# Altium PCB flbnew.PcbDoc
Units mm, origin at the board's own origin, x right, y up, seen from the top; angles counter-clockwise.
Board outline 63.5 x 40.89 mm, 2 copper layers (Top Layer, Bottom Layer); 78 components, 52 nets, 285 pads, 14 vias.
Unrouted connection lines stored in the file: 107.
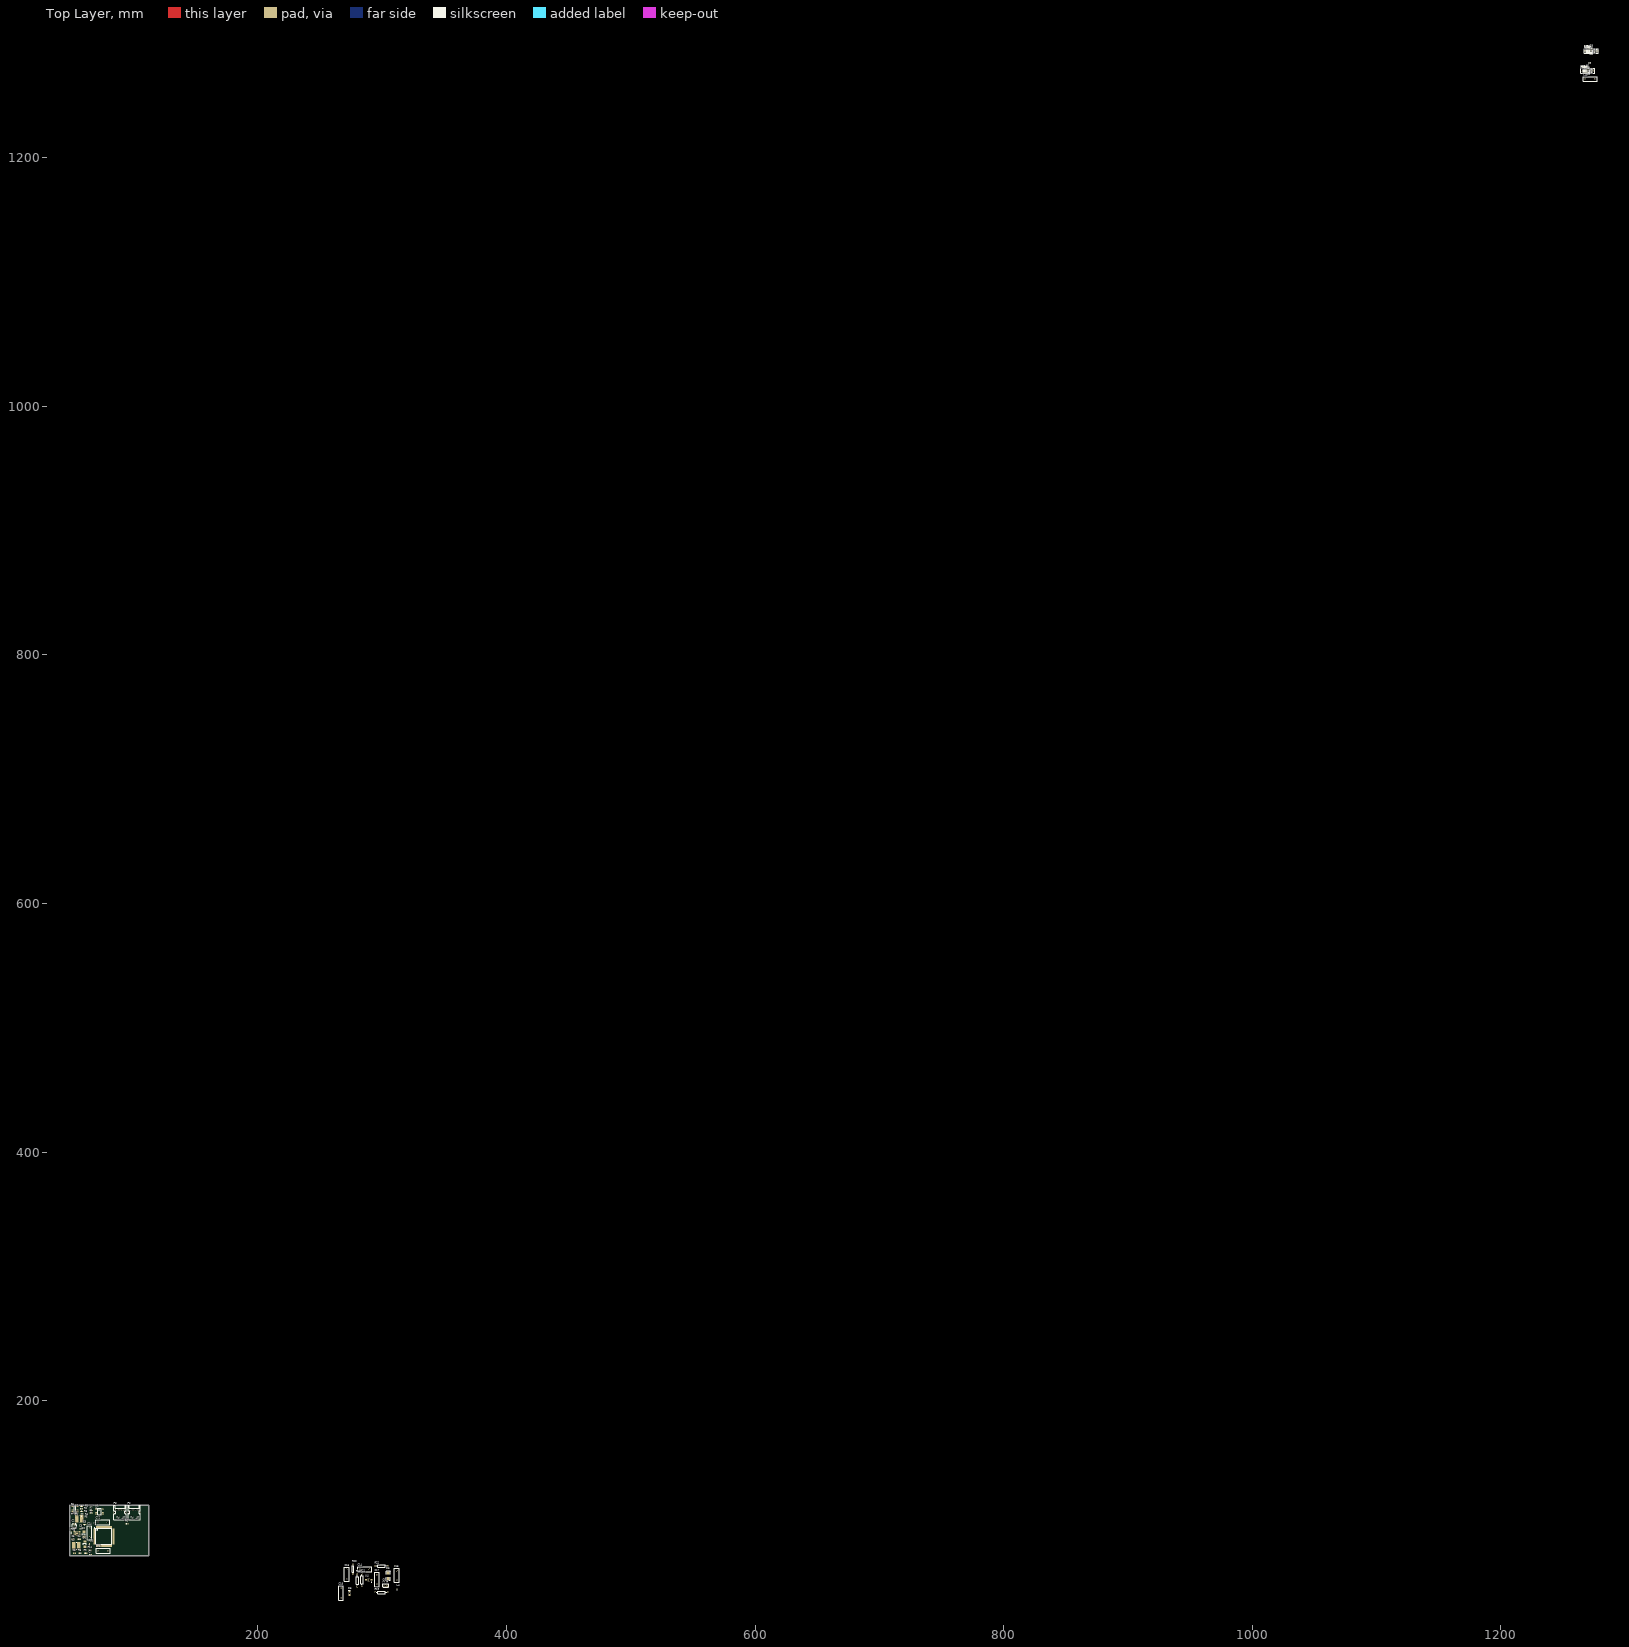
[diagram p0: Top Layer view]
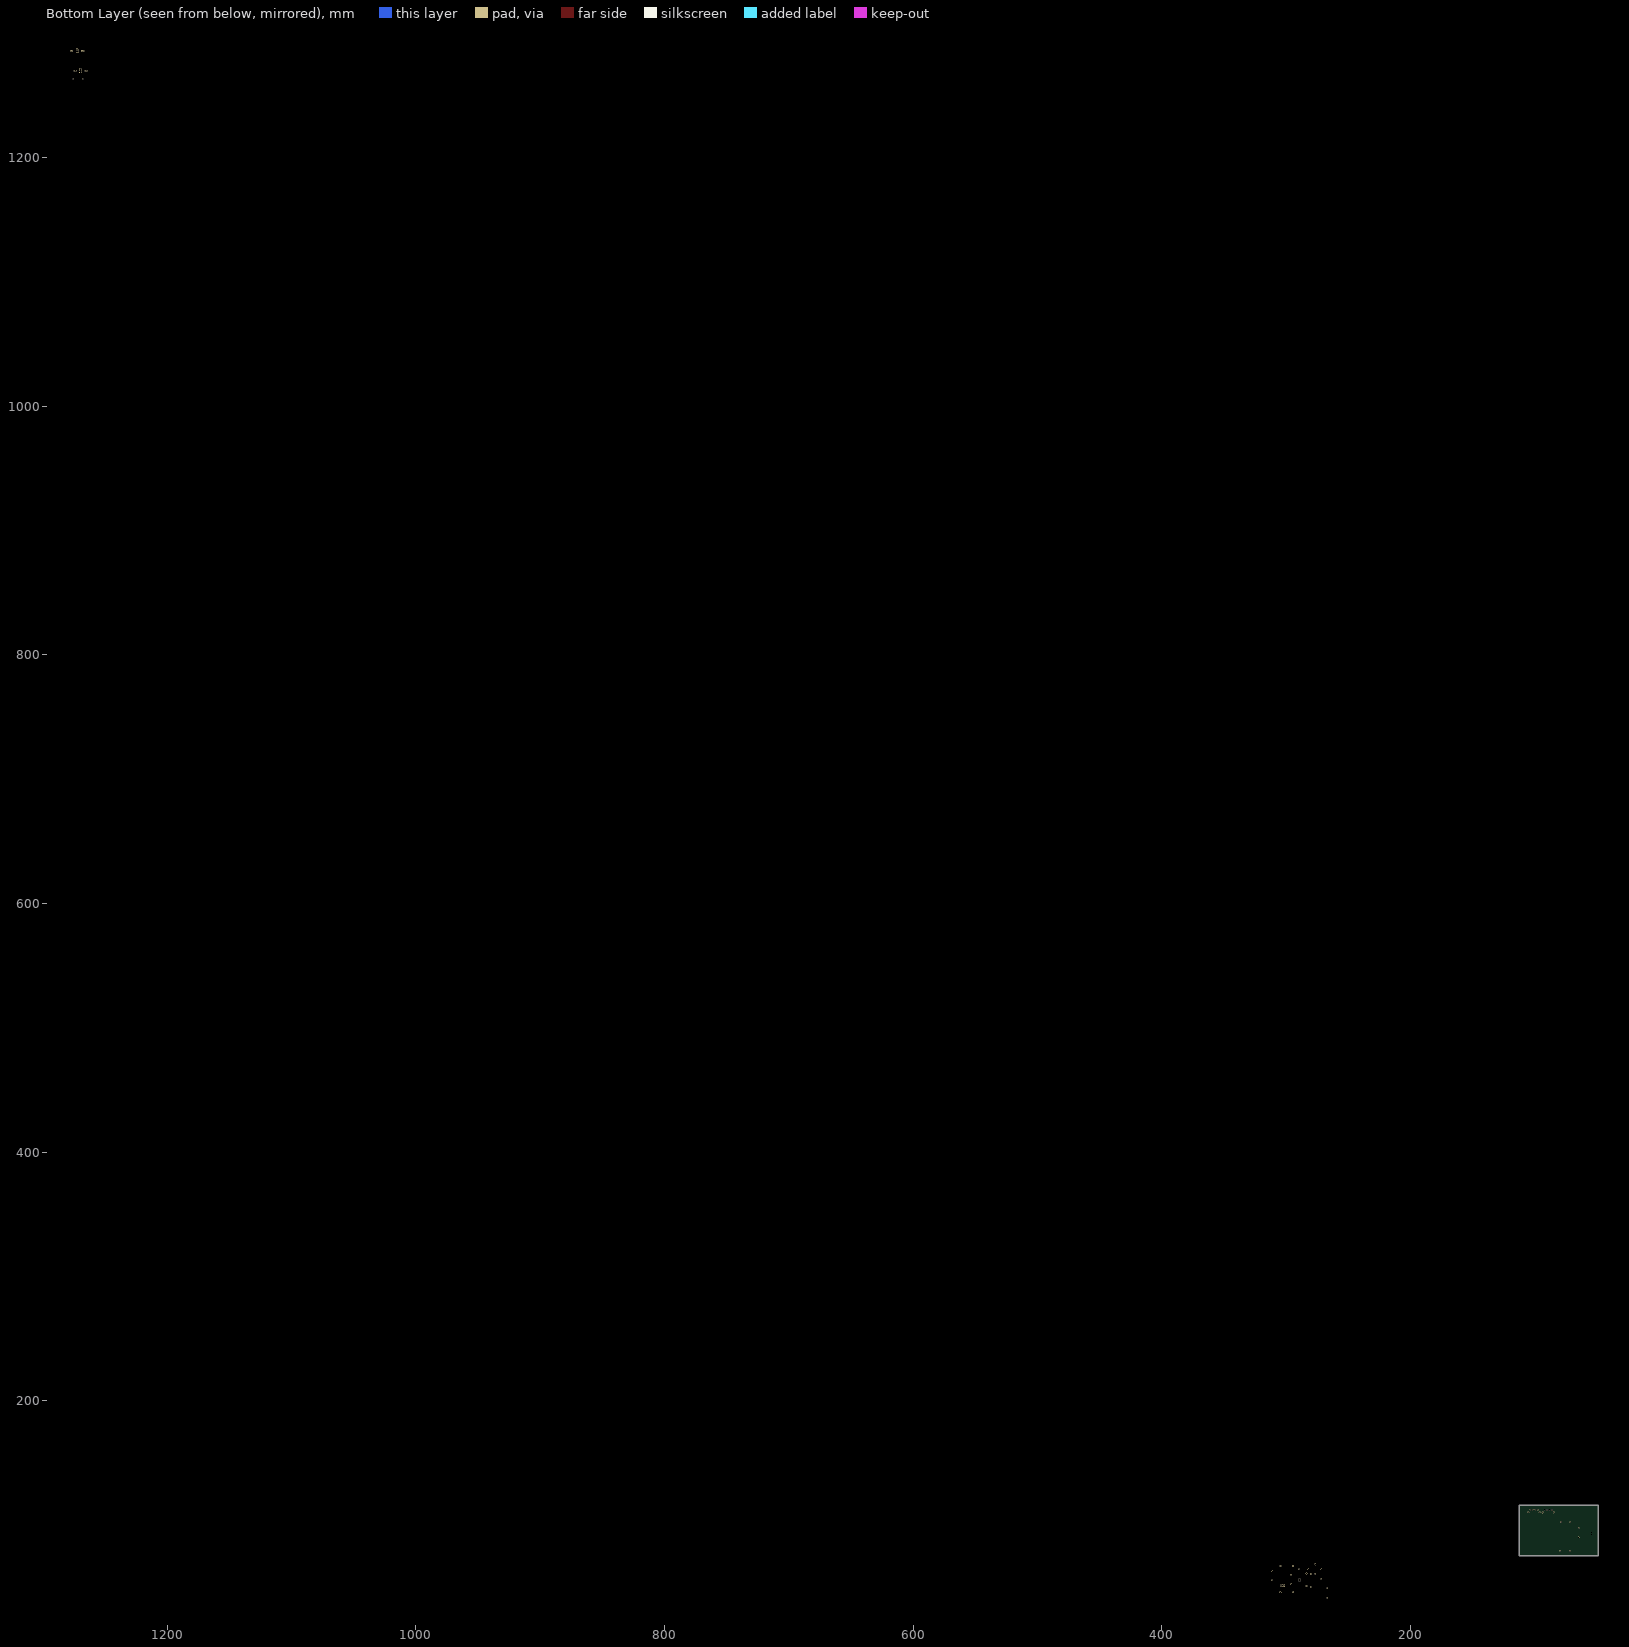
[diagram p1: Bottom Layer view, seen from below]

## Layer stack, top to bottom
Top Layer: signal copper 0.0356
Dielectric: dielectric 0.32, FR-4, Dk 4.8
Bottom Layer: signal copper 0.0356

## Board outline
48.768,75.184 112.268,75.184 112.268,115.951 48.768,116.078

## Design rules (kind name [scope] priority, off if disabled: settings)
Clearance [All] p1: gap=0.254
PolygonConnect [All] p1: connectstyle=Relief reliefconductorwidth=0.254 reliefentries=4 polygonreliefangle="90 Angle" airgapwidth=0.254
RoomDefinition U_ledcurrentdriver3 [InComponentClass('U_ledcurrentdriver3')] p1: confinementstyle=ConfineIn formatcopy=TRUE lockcomponents=FALSE outline 1266.571,1283.335 1305.56,1283.335 1305.56,1293.368 1266.571,1293.368
RoomDefinition U_ledcurrentdriver2 [InComponentClass('U_ledcurrentdriver2')] p2: confinementstyle=ConfineIn formatcopy=TRUE lockcomponents=FALSE outline 264.414,37.719 314.706,37.719 314.706,71.247 264.414,71.247
RoomDefinition U_ledcurrentdriver1 [InComponentClass('U_ledcurrentdriver1')] p3: confinementstyle=ConfineIn formatcopy=TRUE lockcomponents=FALSE outline 1263.904,1267.333 1302.385,1267.333 1302.385,1277.366 1263.904,1277.366
RoomDefinition "U_Dual 5V+3" [InComponentClass('U_Dual 5V+3')] p4: confinementstyle=ConfineIn formatcopy=TRUE lockcomponents=FALSE outline 49.911,75.311 59.563,75.311 59.563,102.616 49.911,102.616
RoomDefinition "U_CAN Transciever" [InComponentClass('U_CAN Transciever')] p5: confinementstyle=ConfineIn formatcopy=TRUE lockcomponents=FALSE outline 63.699,106.807 77.47,106.807 77.47,115.57 63.699,115.57
RoomDefinition "U_CAN Termination Connector (JST)" [InComponentClass('U_CAN Termination Connector (JST)')] p6: confinementstyle=ConfineIn formatcopy=TRUE lockcomponents=FALSE outline 83.947,99.187 111.252,99.187 111.252,116.205 83.947,116.205
RoomDefinition "U_ARM JTAG Header (vertical)" [InComponentClass('U_ARM JTAG Header (vertical)')] p7: confinementstyle=ConfineIn formatcopy=TRUE lockcomponents=FALSE outline 49.011,103.617 62.562,103.617 62.562,115.682 49.011,115.682
RoomDefinition flbmain [InComponentClass('flbmain')] p8: confinementstyle=ConfineIn formatcopy=TRUE lockcomponents=FALSE outline 62.073,76.447 88.699,76.447 88.699,105.403 62.073,105.403
RoutingVias [All] p1: holewidth=0.711 width=1.27 viastyle="Through Hole" minholewidth=0.711 minwidth=1.27 maxholewidth=0.711 maxwidth=1.27
SilkscreenOverComponentPads [All] p1: minsilkscreentomaskgap=0.254
SolderMaskExpansion [All] p1: expansion=0.102
Width [All] p1: maxlimit=0.254 minlimit=0.254 preferedwidth=0.254
27 further rules are at their usual default settings.

## Classes and differential pairs
channel class ledcurrentdriver: U_ledcurrentdriver1 U_ledcurrentdriver2 U_ledcurrentdriver3
net class Power: +3.3 +5 GND NetC2_1
component class U_ledcurrentdriver3: C19 C20 C21 C22 C23 D7 D8 L5 Q3 R23 R24 R25 R26 R27 U5
component class U_ledcurrentdriver2: C14 C15 C16 C17 C18 D5 D6 L4 Q2 R18 R19 R20 R21 R22 U4
component class U_ledcurrentdriver1: C9 C10 C11 C12 C13 D3 D4 L3 Q1 R13 R14 R15 R16 R17 U3
component class "U_Dual 5V+3": C2 C3 C4 C5 C6 C7 C8 D1 D2 L1 L2 R8 R9 R10 R11 R12 U2
component class "U_CAN Transciever": C1 R7 U1
component class "U_CAN Termination Connector (JST)": P2 P3 R6
component class "U_ARM JTAG Header (vertical)": P1 R1 R2 R3 R4 R5
component class flbmain: *1 C24 C?1 C?2

## Components (designator, comment, footprint, x,y, rotation, side; value= is the part's Value field where it differs from the comment)
*1 "AT90CAN128" TQFP80P1600X1600X120-64N 76.17,90.798 r0 top
C1 "Cap" C0603 65.913,109.728 r0 top
C2 "Cap Pol1" EEEHC1H2R2R 52.197,97.917 r0 top (schematic designator C1)
C3 "Cap" C0603 57.785,97.028 r0 top (schematic designator C2)
C4 "Cap" C0603 56.261,88.519 r0 top (schematic designator C3)
C5 "Cap" C0805 51.308,88.646 r0 top (schematic designator C4)
C6 "Cap" C0805 52.413,77.216 r0 top (schematic designator C5)
C7 "Cap" C0603 65.278,76.2 r0 top (schematic designator C6)
C8 "Cap" C0603 60.706,100.33 r0 top (schematic designator C7)
C9 "Cap" RAD-0.3 1269.987,1269.987 r0 top (schematic designator C2)
C10 "Cap" RAD-0.3 1269.987,1269.987 r0 top (schematic designator C3)
C11 "Cap" RAD-0.3 1269.987,1269.987 r0 top (schematic designator C4)
C12 "Cap" RAD-0.3 1269.987,1269.987 r0 top (schematic designator C1)
C13 "Cap" RAD-0.3 1271.905,1263.396 r0 top (schematic designator C5)
C14 "Cap" RAD-0.3 285.877,64.389 r180 top (schematic designator C2)
C15 "Cap" RAD-0.3 311.658,59.563 r90 top (schematic designator C3)
C16 "Cap" RAD-0.3 271.526,60.452 r90 top (schematic designator C4)
C17 "Cap" RAD-0.3 295.783,56.134 r90 top (schematic designator C1)
C18 "Cap" RAD-0.3 266.954,45.339 r90 top (schematic designator C5)
C19 "Cap" RAD-0.3 1272.654,1285.989 r0 top (schematic designator C2)
C20 "Cap" RAD-0.3 1272.654,1285.989 r0 top (schematic designator C3)
C21 "Cap" RAD-0.3 1272.654,1285.989 r0 top (schematic designator C4)
C22 "Cap" RAD-0.3 1272.654,1285.989 r0 top (schematic designator C1)
C23 "Cap" RAD-0.3 1272.654,1285.989 r0 top (schematic designator C5)
C24 "Cap" RAD-0.3 64.613,93.846 r90 top (schematic designator C8)
C?1 "Cap" RAD-0.3 75.535,79.241 r180 top (schematic designator C6)
C?2 "Cap" RAD-0.3 75.154,102.228 r180 top (schematic designator C7)
D1 "D Schottky" VS-10BQ030TRPBF 60.833,84.709 r90 top
D2 "D Schottky" VS-10BQ030TRPBF 60.071,92.583 r90 top
D3 "LED0" "SML-01 (ROHM LED SERIES)" 1269.987,1269.987 r0 top (schematic designator D1)
D4 "D Schottky" SMB 1269.987,1269.987 r0 top (schematic designator D2)
D5 "LED0" "SML-01 (ROHM LED SERIES)" 273.685,45.085 r90 top (schematic designator D1)
D6 "D Schottky" SMB 304.8,59.309 r90 top (schematic designator D2)
D7 "LED0" "SML-01 (ROHM LED SERIES)" 1272.654,1285.989 r0 top (schematic designator D1)
D8 "D Schottky" SMB 1272.654,1285.989 r0 top (schematic designator D2)
L1 "Inductor" SDR0604-150YL 56.261,105.156 r0 top
L2 "Inductor" SDR0604-150YL 53.975,83.312 r0 top
L3 "Inductor" 0402-A 1269.987,1269.987 r0 top (schematic designator L1)
L4 "Inductor" 0402-A 311.912,49.022 r90 top (schematic designator L1)
L5 "Inductor" 0402-A 1272.654,1285.989 r0 top (schematic designator L1)
P1 "Header 5X2" FTSH-105-01-L-DV 49.9,109.078 r0 top
P2 "Header 4" S04B-PASK-2 103.529,112.336 r180 top (schematic designator P1)
P3 "Header 4" S04B-PASK-2 92.106,112.268 r180 top (schematic designator P2)
Q1 "MOSFET-P FDC658AP" E3 1269.987,1269.987 r0 top
Q2 "MOSFET-P FDC658AP" E3 302.768,51.181 r90 top (schematic designator Q1)
Q3 "MOSFET-P FDC658AP" E3 1272.654,1285.989 r0 top (schematic designator Q1)
R1 "Res" R0603 58.155,115.174 r0 top
R2 "Res" R0603 58.028,113.142 r0 top
R3 "Res" R0603 58.282,110.983 r0 top
R4 "Res" R0603 58.536,108.951 r0 top
R5 "Res" R0603 58.409,107.046 r0 top
R6 "Res2" R0603 94.639,101.033 r0 top (schematic designator R1)
R7 "Res" R0603 65.985,111.633 r180 top (schematic designator R1)
R8 "Res" R0603 56.985,77.216 r0 top (schematic designator R1)
R9 "Res" R0603 61.43,77.216 r0 top (schematic designator R2)
R10 "Res" R0603 64.516,84.201 r90 top (schematic designator R3)
R11 "Res" R0603 64.643,79.883 r0 top (schematic designator R4)
R12 "Res" R0603 49.911,93.599 r90 top (schematic designator R5)
R13 "Res2" AXIAL-0.4 1269.987,1269.987 r0 top (schematic designator R1)
R14 "Res2" AXIAL-0.4 1269.987,1269.987 r0 top (schematic designator R2)
R15 "Res1" AXIAL-0.3 1269.987,1269.987 r0 top (schematic designator R3)
R16 "Res2" AXIAL-0.4 1269.987,1269.987 r0 top (schematic designator R4)
R17 "Res2" AXIAL-0.4 1269.987,1269.987 r0 top (schematic designator R5)
R18 "Res2" AXIAL-0.4 280.035,55.499 r90 top (schematic designator R1)
R19 "Res2" AXIAL-0.4 299.466,45.847 r180 top (schematic designator R2)
R20 "Res1" AXIAL-0.3 276.479,64.516 r90 top (schematic designator R3)
R21 "Res2" AXIAL-0.4 283.591,55.958 r90 top (schematic designator R4)
R22 "Res2" AXIAL-0.4 299.466,67.056 r180 top (schematic designator R5)
R23 "Res2" AXIAL-0.4 1272.654,1285.989 r0 top (schematic designator R1)
R24 "Res2" AXIAL-0.4 1272.654,1285.989 r0 top (schematic designator R2)
R25 "Res1" AXIAL-0.3 1272.654,1285.989 r0 top (schematic designator R3)
R26 "Res2" AXIAL-0.4 1272.654,1285.989 r0 top (schematic designator R4)
R27 "Res2" AXIAL-0.4 1272.654,1285.989 r0 top (schematic designator R5)
U1 "MCP2551" MCP2551 72.534,110.871 r0 top
U2 "LT3509" LT3509 54.356,93.091 r0 top (schematic designator U1)
U3 "LM3409 LED Driver" "10eMSOP + thermal pad - LM3409" 1269.987,1269.987 r0 top (schematic designator U1)
U4 "LM3409 LED Driver" "10eMSOP + thermal pad - LM3409" 289.179,55.753 r180 top (schematic designator U1)
U5 "LM3409 LED Driver" "10eMSOP + thermal pad - LM3409" 1272.654,1285.989 r0 top (schematic designator U1)

## Footprints (in the part's own frame and the unit in brackets; to place one, negate y for a bottom-side part, rotate by r counter-clockwise, add the part's x,y. Pads: shape width x height; smd on the part's side, far side on the other; paste and mask are expansions set on the pad)
"10eMSOP + thermal pad - LM3409" [mm] "TSSOP, 10-Leads, Body 3.1x3.1mm (max), Pitch 0.50mm, IPC Medium Density"
  rect 1.4x0.32 smd: 1(-2.2,1) 2(-2.2,0.5) 3(-2.2,0) 4(-2.2,-0.5) 5(-2.2,-1) 6(2.2,-1) 7(2.2,-0.5) 8(2.2,0) 9(2.2,0.5) 10(2.2,1)
  rect 2x2.4 smd: 11(0,0)
  silkscreen extent -2.32,1.59 -2.07,1.83, body extent -1.55,-1.55 1.55,1.55, height 1.09
0402-A [mm] "Chip Inductor, Body 1.0x0.5mm, IPC High Density"
  rect 0.6x0.5 smd: 1(-0.5,0) 2(0.5,0)
  silkscreen extent -1.1,-0.15 -1.1,0.15, body extent -0.55,-0.3 0.55,0.3, height 0.55
AXIAL-0.3 [mm] "Axial Device, Thru-Hole; 2 Leads; 0.3 in Pin Spacing"
  round 1.4 hole 0.85: 1(-3.81,0) 2(3.81,0)
  silkscreen extent -2.77,-0.76 2.77,0.76
AXIAL-0.4 [mm] "Axial Device, Thru-Hole; 2 Leads; 0.4 in Pin Spacing"
  round 1.4 hole 0.85: 1(-5.08,0) 2(5.08,0)
  silkscreen extent -4.06,-1.02 4.06,1.02
C0603 [mm] "Chip Capacitor, 2-Leads, Body 1.6x0.8mm, IPC Medium Density"
  rect 1x0.95 smd: 1(-0.8,0) 2(0.8,0)
  silkscreen extent 0,-0.38 0,0.38, body extent -0.88,-0.48 0.87,0.48, height 0.8
C0805 [mm] "Chip Capacitor, Body 2.0x1.3mm, IPC High Density"
  rect 1.1x1.4 smd: 1(-0.75,0) 2(0.75,0)
  body extent -1.1,-0.72 1.1,0.72, height 1.4
E3 [mm] "TO, Flat Index; 3 In-Line, Axial Leads; Body Dia. 4.6mm; Lead Dia. 0.5 mm (max)"
  oval 2x1 hole 0.8: 1(0,1.27) 2(0,0) 3(0,-1.27)
  silkscreen extent -1.41,-2.41 1.41,2.41
EEEHC1H2R2R [mm] "PANASONIC - EEEHC1H2R2R - CAPACITOR, ELECTROLYTIC, 50V, 2.2UF"
  rect 0.8x2 smd: 1(0,2.8) 2(0,0)
  silkscreen extent -2,-0.48 2,3.28, body extent -2.15,-0.9 2.15,3.7, height 5.9
FTSH-105-01-L-DV [mm] "HEADER, 1.27MM, SMD, 10WAY"
  rect 1.9x0.7 smd: 1(0.9,5.725) 2(4.95,5.725) 3(0.9,4.456) 4(4.95,4.456) 5(0.9,3.187) 6(4.95,3.187) 7(0.9,1.919) 8(4.95,1.919) 9(0.9,0.65) 10(4.95,0.65)
  silkscreen extent 2.2,-0.1 3.7,6.4, body extent 0,0 5.84,6.35, height 5.97
LT3509 [mm] "LT3509"
  oval 1.6x0.3 smd: 1(-2.05,1.75) 2(-2.05,1.25) 3(-2.05,0.75) 4(-2.05,0.25) 5(-2.05,-0.25) 6(-2.05,-0.75) 7(-2.05,-1.25) 8(-2.05,-1.75) 9(2.05,-1.75) 10(2.05,-1.25) 11(2.05,-0.75) 12(2.05,-0.25) 13(2.05,0.25) 14(2.05,0.75) 15(2.05,1.25) 16(2.05,1.75)
  rect 1.9x3.3 smd: 17(0,0)
  silkscreen extent -2.17,2.33 -1.92,2.57, body extent -1.55,-2.07 1.55,2.07, height 1.1
MCP2551 [mm]
  oval 1.7x0.6 smd: 1(-2.65,1.905) 2(-2.65,0.635) 3(-2.65,-0.635) 4(-2.65,-1.905) 5(2.65,-1.905) 6(2.65,-0.635) 7(2.65,0.635) 8(2.65,1.905)
  silkscreen extent -2.77,-2.5 1.4,2.88, body extent -1.99,-2.5 1.99,2.5, height 1.75
R0603 [mm]
  rect 1x1 smd: 1(-0.8,0) 2(0.8,0)
  silkscreen extent 0,-0.4 0,0.4, body extent -0.85,-0.48 0.85,0.47, height 0.45
RAD-0.3 [mm] "Radial Cap, Thru-Hole; 2 Leads; 0.3 in Pin Spacing"
  round 1.2 hole 0.7: 1(-3.81,0) 2(3.81,0)
  silkscreen extent -5.71,-1.91 5.71,1.91
S04B-PASK-2 [mm] "JST (JAPAN SOLDERLESS TERMINALS) - S04B-PASK-2 - HEADER, PA, 4WAY, SIDE, 2MM"
  rect 1x1 hole 0.7: 1(6,0)
  round 1 hole 0.7: 2(4,0) 3(2,0) 4(0,0)
  round 1.4 hole 1.1: ""(-1.5,2.1) ""(7.5,2.1)
  silkscreen extent -2,-3.5 8,8.2, body extent -2,-3.5 8,8.2, height 6.5
SDR0604-150YL [mm] "BOURNS - SDR0604-150YL - INDUCTOR, SMD, 15UH, 1.6A"
  rect 2.95x5.9 smd: 1(-2.025,0) 2(2.025,0)
  silkscreen extent -0.15,-2.9 0.15,2.9, body extent -2.9,-2.88 2.9,2.92, height 4.8
SMB [mm] "DO-214-AA/SMB; 2 C-Bend Leads; Body 5.3 x 3.6 mm, inc. leads (LxW)"
  rect 2.3x2.3 smd: 1(-2.25,0) 2(2.25,0)
  silkscreen extent -3.8,-1.55 4.1,1.55
"SML-01 (ROHM LED SERIES)" [mm] "ROHM Chip LEDs with Reflector,1208<3.0x2.0 t=1.3mm>, Medium / High Brightness Type"
  rect 1.55x1.8 smd: 1(-1.475,0) 2(1.475,0)
  silkscreen extent -0.15,-0.95 2.55,0.95, body extent -1.6,-0.95 1.6,0.95, height 1.5
TQFP80P1600X1600X120-64N [mm] "TQFP, 64-Leads, Body 16.0x16.0mm (max), Pitch 0.80mm, IPC Medium Density"
  rect 1.6x0.55 smd: 1(-7.65,6) 2(-7.65,5.2) 3(-7.65,4.4) 4(-7.65,3.6) 5(-7.65,2.8) 6(-7.65,2) 7(-7.65,1.2) 8(-7.65,0.4) 9(-7.65,-0.4) 10(-7.65,-1.2) 11(-7.65,-2) 12(-7.65,-2.8) 13(-7.65,-3.6) 14(-7.65,-4.4) 15(-7.65,-5.2) 16(-7.65,-6) 33(7.65,-6) 34(7.65,-5.2) 35(7.65,-4.4) 36(7.65,-3.6) 37(7.65,-2.8) 38(7.65,-2) 39(7.65,-1.2) 40(7.65,-0.4) 41(7.65,0.4) 42(7.65,1.2) 43(7.65,2) 44(7.65,2.8) 45(7.65,3.6) 46(7.65,4.4) 47(7.65,5.2) 48(7.65,6)
  rect 0.55x1.6 smd: 17(-6,-7.65) 18(-5.2,-7.65) 19(-4.4,-7.65) 20(-3.6,-7.65) 21(-2.8,-7.65) 22(-2,-7.65) 23(-1.2,-7.65) 24(-0.4,-7.65) 25(0.4,-7.65) 26(1.2,-7.65) 27(2,-7.65) 28(2.8,-7.65) 29(3.6,-7.65) 30(4.4,-7.65) 31(5.2,-7.65) 32(6,-7.65) 49(6,7.65) 50(5.2,7.65) 51(4.4,7.65) 52(3.6,7.65) 53(2.8,7.65) 54(2,7.65) 55(1.2,7.65) 56(0.4,7.65) 57(-0.4,7.65) 58(-1.2,7.65) 59(-2,7.65) 60(-2.8,7.65) 61(-3.6,7.65) 62(-4.4,7.65) 63(-5.2,7.65) 64(-6,7.65)
  silkscreen extent -7.77,-6.45 6.45,6.95, body extent -7,-7 7,7, height 1.2
VS-10BQ030TRPBF [mm] "VISHAY FORMERLY I.R. - VS-10BQ030TRPBF - DIODE, SCHOTTKY, 1A, 30V"
  rect 2x2.5 smd: 1(-2.05,0) 2(2.05,0)
  silkscreen extent -0.6,-1.2 0.6,1.2, body extent -2.2,-1.8 2.2,1.8, height 2.4

## Part data
C1 C3 C4 C5 C6 C7 C8 C9 C10 C11 C12 C13 C14 C15 C16 C17 C18 C19 C20 C21 C22 C23 C24 C?1 C?2: "Capacitor"
C2: "Polarized Capacitor (Radial)"
D1 D2 D4 D6 D8: "Schottky Diode"
D3 D5 D7: "Typical INFRARED GaAs LED"
P1: "Header, 5-Pin, Dual row"
P2 P3: "Header, 4-Pin"
Q1 Q2 Q3: library part MOSFET-P, "P-Channel MOSFET"
R1 R2 R3 R4 R5 R7 R8 R9 R10 R11 R12: library part Res2, "Resistor"
R6 R13 R14 R15 R16 R17 R18 R19 R20 R21 R22 R23 R24 R25 R26 R27: "Resistor"
U1: "High-speed CAN Transceiver, 1Mb/s"
U3 U4 U5: library part LM3409, "PFET Buck Controller for High Power LED Drivers"

## Via types
v1: diameter 0.66, hole 0.33, Top Layer to Bottom Layer, tented top, 12 vias
v2: diameter 0.6, hole 0.3, Top Layer to Bottom Layer, tented top, 2 vias

## Nets (pads, with @x,y where several pads share a name; then routed paths per layer and width w, separated by ;. In a path a pad name is that pad's centre, name@x,y a point inside that pad or via, vN(x,y) a via of type N, cw(c..) or ccw(c..) an arc to the next point about the centre after c; other vN are vias at no path point)
+3.3: C5.1 L1.1 P1.1 R1.2 R2.2 R3.2 R4.2 R5.2 R8.2
+5: C1.1 C6.1 L2.2 R9.2 U1.3 U2.13
GND: *1.21 *1.22 *1.52 *1.53 *1.63 *1.64 C1.2 C2.2 C5.2 C6.2 C7.2 C8.2 C10.1 C11.2 C12.2 C13.1 C15.1 C16.2 C17.2 C18.1 C20.1 C21.2 C22.2 C23.1 C24.1 C24.2 C?1.1 C?1.2 C?2.1 C?2.2 D3.2 D4.1 D5.2 D6.1 D7.2 D8.1 P1.3 P1.5 P1.9 P2.1 P3.1 R7.1 R10.1 R11.1 R12.1 R14.1 R19.1 R24.1 U1.2 U2.12 U2.14 U2.17 U3.5 U3.11 U4.5 U4.11 U5.5 U5.11
  other v1: 288.643,55.153 289.716,55.153 288.643,56.353 289.716,56.353
  other v2: 54.356,92.329 54.356,93.853
Net*1_15: *1.15 R15.1
Net*1_16: *1.16 R20.1
Net*1_17: *1.17 R25.1
Net*1_30: *1.30 U1.1
Net*1_31: *1.31 U1.4
Net*1_35: *1.35 U3.3
Net*1_36: *1.36 U4.3
Net*1_37: *1.37 U5.3
  other v1: 1272.118,1285.389 1273.191,1285.389 1272.118,1286.589 1273.191,1286.589
NetC2_1: C2.1 C9.2 C10.2 C14.2 C15.2 C19.2 C20.2 P2.2 P3.2 R13.2 R16.2 R18.2 R21.2 R23.2 R26.2 U2.4 U2.5 U3.8 U3.10 U4.8 U4.10 U5.8 U5.10
NetC3_1: C3.1 D1.2 L1.2 U2.3
NetC3_2: C3.2 U2.2
NetC4_1: C4.1 D2.2 L2.1 U2.6
NetC4_2: C4.2 U2.7
NetC7_1: C7.1 U2.15
NetC8_1: C8.1 U2.10
NetC9_1: C9.1 U3.9
NetC11_1: C11.1 R15.2 U3.2
NetC12_1: C12.1 R17.2 U3.4
NetC13_2: C13.2 D3.1 L3.2 R17.1
NetC14_1: C14.1 U4.9
NetC16_1: C16.1 R20.2 U4.2
NetC17_1: C17.1 R22.2 U4.4
NetC18_2: C18.2 D5.1 L4.2 R22.1
NetC19_1: C19.1 U5.9
NetC21_1: C21.1 R25.2 U5.2
NetC22_1: C22.1 R27.2 U5.4
NetC23_2: C23.2 D7.1 L5.2 R27.1
NetD1_1: D1.1 U2.1
NetD2_1: D2.1 U2.8
NetD4_2: D4.2 L3.1 Q1.3
NetD6_2: D6.2 L4.1 Q2.3
NetD8_2: D8.2 L5.1 Q3.3
NetP2_3: P2.3 P3.3 R6.2 U1.6
NetP2_4: P2.4 P3.4 R6.1 U1.7
NetQ1_1: Q1.1 R16.1 U3.7
NetQ2_1: Q2.1 R21.1 U4.7
NetQ3_1: Q3.1 R26.1 U5.7
NetR7_2: R7.2 U1.8
NetR8_1: R8.1 R10.2 U2.16
NetR9_1: R9.1 R11.2 U2.9
NetR12_2: R12.2 U2.11
NetR13_1: R13.1 R14.2 U3.1
NetR18_1: R18.1 R19.2 U4.1
NetR23_1: R23.1 R24.2 U5.1
NRST: *1.20 P1.10 R5.1
TCK: P1.4 R2.1
TDI: P1.8 R3.1
TDO: P1.6 R4.1
TMS: P1.2 R1.1
pads on no net: *1.1 *1.2 *1.3 *1.4 *1.5 *1.6 *1.7 *1.8 *1.9 *1.10 *1.11 *1.12 *1.13 *1.14 *1.18 *1.19 *1.23 *1.24 *1.25 *1.26 *1.27 *1.28 *1.29 *1.32 *1.33 *1.34 *1.38 *1.39 *1.40 *1.41 *1.42 *1.43 *1.44 *1.45 *1.46 *1.47 *1.48 *1.49 *1.50 *1.51 *1.54 *1.55 *1.56 *1.57 *1.58 *1.59 *1.60 *1.61 *1.62 P1.7 P2. P3. Q1.2 Q2.2 Q3.2 U1.5 U3.6 U4.6 U5.6
copper on no net:
  other v1: 1269.451,1269.387 1270.524,1269.387 1269.451,1270.587 1270.524,1270.587

## Text inside footprints (layer, text, board x,y; h text height)
P1: Top Overlay "10" at 55.25,107.478 h1 r90; Top Overlay "9" at 51.3,108.303 h1 r90; Top Overlay "2" at 55.25,115.528 h1 r90; Top Overlay "1" at 51.3,115.528 h1 r90
P2: Top Overlay "JST  PA" at 104.729,107.536 h2.5 r180
P3: Top Overlay "JST  PA" at 93.306,107.468 h2.5 r180
Q1: Top Overlay "1" at 1272.262,1270.542 h1.5; Top Overlay "3" at 1272.262,1268.024 h1.5
Q2: Top Overlay "1" at 302.213,53.456 h1.5 r90; Top Overlay "3" at 304.731,53.456 h1.5 r90
Q3: Top Overlay "1" at 1274.929,1286.544 h1.5; Top Overlay "3" at 1274.929,1284.026 h1.5